# EAGLE board Joy2PS2_rev2_3 (EAGLE 7.6.0)
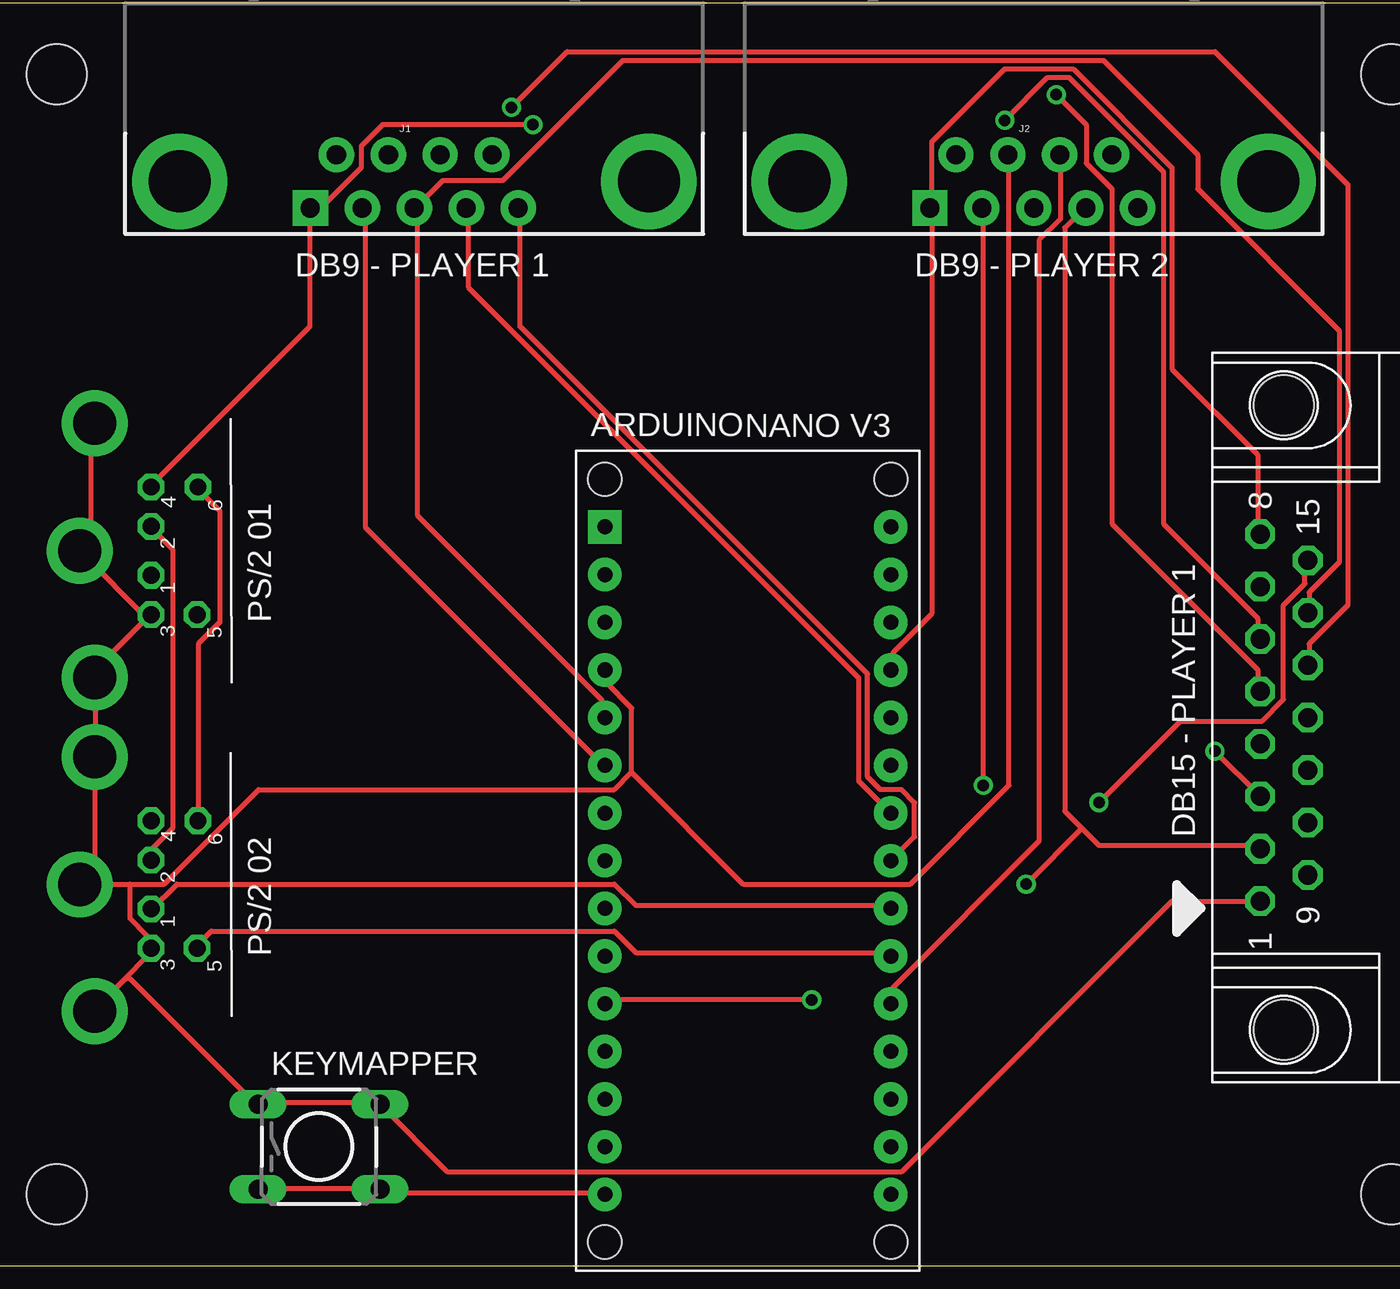
[diagram p0: board, top side]
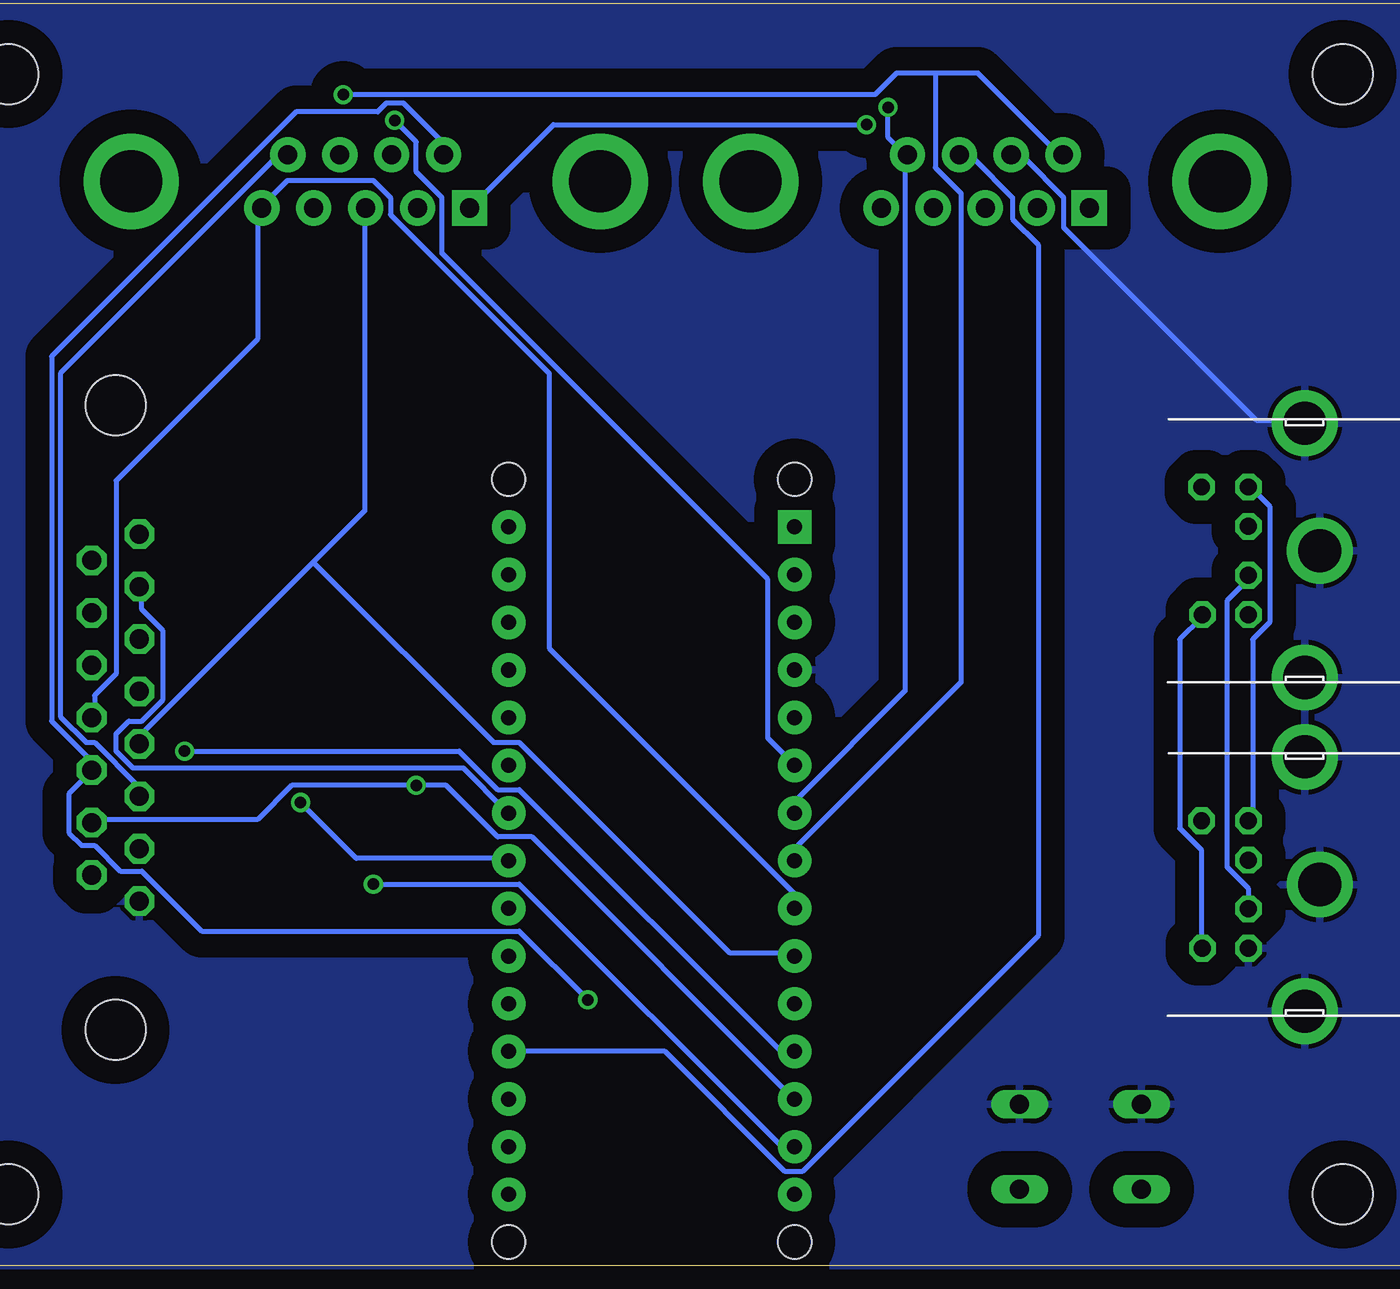
[diagram p1: board, bottom side, seen from below]

No outline drawn. Coordinates in mm, seen from the top.
Copper layers (1*16): Top 0.035mm / dielectric 1.5mm / Bottom 0.035mm
Design rules "default": minimum track width 10mil, minimum drill 24mil, track to track 8mil, track to pad 8mil, pad to pad 8mil, via to via 8mil, smd to smd 8mil, copper to edge 40mil, drill to drill 8mil, minimum pad ring 10mil, minimum via ring 8mil, stop-mask expansion 4mil, vias tented up to drill 0mil, thermal gap 10mil
Holes 3.2 mm at 59.69,63.5 59.69,3.81 -11.43,63.5 -11.43,3.81
Milling: 4 lines

## Footprints (pad centres in the part's own frame; a part is rotated, then mirrored left to right if it is on the bottom)
PDIP-32 = drill 0.8 pad 1.778: 3V3 15.24,-35.56; +5V 15.24,-10.16; A0 15.24,-30.48; A1 15.24,-27.94; A2 15.24,-25.4; A3 15.24,-22.86; A4 15.24,-20.32; A5 15.24,-17.78; A6 15.24,-15.24; A7 15.24,-12.7; AREF 15.24,-33.02; D0/RX 0,-5.08; D2 0,-12.7; D3 0,-15.24; D4 0,-17.78; D5 0,-20.32; D6 0,-22.86; D7 0,-25.4; D8 0,-27.94; D9 0,-30.48; D10 0,-33.02; D11 0,-35.56; D12 0,-38.1; D13 15.24,-38.1; GND 0,-10.16; GND1 15.24,-5.08; RESET 0,-7.62; RESET1 15.24,-7.62; VIN 15.24,-2.54 | drill 0.8 pad 1.778 square: D1/TX 0,-2.54 | hole 1.778: 0,0; 0,-40.64; 15.24,-40.64; 15.24,0
D-15M/90 = drill 1.016 pad 1.575 octagon: 1 9.779,-1.27; 2 6.985,-1.27; 3 4.191,-1.27; 4 1.397,-1.27; 5 -1.397,-1.27; 6 -4.191,-1.27; 7 -6.985,-1.27; 8 -9.779,-1.27; 9 8.382,1.27; 10 5.588,1.27; 11 2.794,1.27; 12 0,1.27; 13 -2.794,1.27; 14 -5.588,1.27; 15 -8.382,1.27 | hole 3.2: 16.637,0; -16.637,0
DB9_MALE = drill 1.016 pad 1.88: 1 5.54,-1.42; 2 2.77,-1.42; 3 0,-1.42; 4 -2.77,-1.42; 6 4.15,1.42; 7 1.38,1.42; 8 -1.38,1.42; 9 -4.15,1.42 | drill 1.016 pad 1.88 square: 5 -5.54,-1.42 | drill 3.302 pad 5.08: G1 -12.5,0; G2 12.5,0
TAC-SWITCH-PTH = drill 1.016 pad 1.524 long: 1 -3.251,2.261; 2 3.251,2.261; 3 -3.251,-2.261; 4 3.251,-2.261
M_DIN6 = drill 0.9 pad 1.422 octagon: 1 -1.3,-3.75; 2 1.3,-3.75; 3 -3.4,-3.75; 4 3.4,-3.75; 5 -3.4,-6.2; 6 3.4,-6.25 | drill 2.3 pad 3.5: SH1 6.8,-0.75; SH2 0,0.05; SH3 -6.75,-0.75

## Placement (x,y rotation side)
ARDUINONANO  ARDUINONANO  [PDIP-32]  17.78,41.91 0 top
CON3  [D-15M/90]  53.98,29.21 270 top
J1  [DB9_MALE]  7.62,57.78 0 top
J2  [DB9_MALE]  40.64,57.78 0 top
KEYMAPPER  TACTILE-SWITCH-PTH  [TAC-SWITCH-PTH]  2.54,6.35 0 top
PS/2_01  [M_DIN6]  -10.16,38.1 90 top
PS/2_02  [M_DIN6]  -10.16,20.32 90 top

## Library data of the parts
ARDUINONANO = jet-lib2
CON3 = connect
J1 J2 = SparkFun-Connectors; PROD_ID: CONN-09904
KEYMAPPER = GeekAmmo
PS/2_01 PS/2_02 = mini_din

## Nets
GND: ARDUINONANO.GND CON3.1 J1.8 J2.8 KEYMAPPER.1 KEYMAPPER.2 PS/2_01.3 PS/2_01.SH1 PS/2_01.SH2 PS/2_01.SH3 PS/2_02.3 PS/2_02.SH1 PS/2_02.SH2 PS/2_02.SH3
N$1: ARDUINONANO.A3 PS/2_01.1 PS/2_02.1
N$2: PS/2_01.2 PS/2_02.2
N$3: ARDUINONANO.+5V CON3.8 J1.5 J2.5 PS/2_01.4 PS/2_02.4
N$4: ARDUINONANO.A0 J1.7
N$5: ARDUINONANO.A2 PS/2_01.5 PS/2_02.5
N$6: ARDUINONANO.D10 CON3.10 J2.4
N$7: ARDUINONANO.D8 CON3.11 J2.9
N$8: ARDUINONANO.A1 J2.7
N$9: ARDUINONANO.A5 CON3.7 J1.2
N$10: ARDUINONANO.D2 CON3.14 J1.3
N$11: ARDUINONANO.D3 CON3.6 J1.4
N$12: ARDUINONANO.D4 CON3.13 J1.6
N$13: ARDUINONANO.D5 CON3.5 J1.9
N$14: ARDUINONANO.D6 CON3.12 J2.1
N$15: ARDUINONANO.D7 CON3.4 J2.3
N$16: ARDUINONANO.D9 CON3.3 J2.6
N$17: ARDUINONANO.D11 CON3.2 J2.2
N$18: ARDUINONANO.A4 CON3.15 J1.1
N$19: ARDUINONANO.D12 KEYMAPPER.3 KEYMAPPER.4
N$20: PS/2_01.6 PS/2_02.6

## Tracks (layer width: path | path; a pad name or v marks a point on that pad's centre or on a via)
GND
  Top 0.254: CON3.1 48.01,19.43 33.6,5.03 9.37,5.03 KEYMAPPER.2 5.71,8.69 -0.69,8.69 KEYMAPPER.1 -0.91,8.69 -7.54,15.32 -7.77,15.32 | -6.63,34.52 -9.6,31.55 PS/2_01.SH3 -9.37,31.32 -9.37,27.2 PS/2_02.SH1 -9.37,26.98 -9.37,20.34 | -6.63,34.52 -10.06,37.95 PS/2_01.SH2 -10.06,38.18 -9.6,38.63 -9.6,44.81 PS/2_01.SH1 | -6.63,34.52 PS/2_01.3 | -7.77,15.32 -9.37,13.72 PS/2_02.SH3 | -7.77,15.32 -6.63,16.46 -6.63,16.92 PS/2_02.3 -6.63,17.14 -6.63,17.6 -7.54,18.52 -7.54,20.34 | 19.2,26.29 19.2,29.72 17.83,31.09 17.83,31.55 ARDUINONANO.GND | 19.2,26.29 18.29,25.38 -0.69,25.38 -5.71,20.34 -7.54,20.34 | -9.37,20.34 -10.06,20.34 PS/2_02.SH2 -9.37,20.34 | -9.37,20.34 -7.54,20.34 | 19.2,26.29 25.15,20.34 34.06,20.34 39.32,25.6 39.32,58.98 J2.8
  Bottom 0.254: J1.8 6.17,58.98 5.49,58.98 3.43,56.92 3.43,55.32 -6.86,45.03 -9.37,45.03 PS/2_01.SH1
  pour Bottom (isolate 1.27): -15.24,67.31 63.5,67.31 63.5,0 -15.24,0
N$1
  Top 0.254: ARDUINONANO.A3 32.92,19.2 19.43,19.2 18.29,20.34 -5.03,20.34 -6.4,18.97 PS/2_02.1
  Bottom 0.254: PS/2_02.1 -6.4,19.2 -6.4,20.12 -5.26,21.26 -5.26,35.43 -6.4,36.58 PS/2_01.1
N$2
  Top 0.254: PS/2_02.2 -6.4,21.72 -6.4,22.17 -5.26,23.32 -5.26,38.18 -6.4,39.32 PS/2_01.2
N$3  (via drill 0.61)
  Top 0.254: PS/2_01.4 -6.4,41.6 2.06,50.06 2.06,56.24 J1.5 2.29,56.46 2.74,56.46 4.8,58.52 4.8,59.66 5.94,60.81 v13.95,60.81 | CON3.8 52.58,39.09 52.58,43.2 48.01,47.78 48.01,58.52 42.75,63.78 39.09,63.78 35.2,59.89 35.2,56.46 J2.5 35.2,56.24 35.2,34.75 33.15,32.69 33.15,31.77 ARDUINONANO.+5V
  Bottom 0.254: PS/2_02.4 -6.63,23.77 -6.63,33.38 -7.54,34.29 -7.54,40.46 -6.63,41.38 PS/2_01.4 | v13.95,60.81 30.63,60.81 34.98,56.46 J2.5
N$4
  Bottom 0.254: ARDUINONANO.A0 24.69,11.43 18.29,5.03 17.37,5.03 4.8,17.6 4.8,54.41 6.17,55.78 6.17,56.92 8.23,58.98 8.91,58.98 J1.7
N$5
  Top 0.254: ARDUINONANO.A2 32.92,16.69 19.43,16.69 18.29,17.83 -3.2,17.83 -3.89,17.14 PS/2_02.5
  Bottom 0.254: PS/2_02.5 -3.89,17.14 -3.89,22.17 -2.74,23.32 -2.74,33.38 -3.89,34.52 PS/2_01.5
N$6  (via drill 0.61)
  Top 0.254: v37.95,25.6 37.95,56.24 J2.4
  Bottom 0.254: CON3.10 55.09,23.77 46.41,23.77 44.58,25.6 v37.95,25.6 36.35,25.6 33.6,22.86 31.77,22.86 17.83,8.91 ARDUINONANO.D10
N$7  (via drill 0.61)
  Top 0.254: v28.8,14.17 17.83,14.17 ARDUINONANO.D8
  Bottom 0.254: J2.9 36.58,59.21 36.58,59.89 38.63,61.95 39.55,61.95 40.01,61.49 44.35,61.49 57.38,48.46 57.38,29.03 55.32,26.98 55.32,26.52 CON3.11 55.32,26.29 56.46,25.15 56.46,23.09 55.78,22.4 55.09,22.4 53.72,21.03 52.58,21.03 49.38,17.83 32.46,17.83 v28.8,14.17
N$8
  Top 0.254: ARDUINONANO.A1 33.15,14.17 33.15,14.86 40.92,22.63 40.92,54.63 42.06,55.78 42.06,58.98 J2.7
N$9
  Top 0.254: ARDUINONANO.A5 31.32,25.83 31.32,31.32 10.52,52.12 10.52,56.24 J1.2
  Bottom 0.254: CON3.7 52.58,36.12 52.58,34.98 51.44,33.83 51.44,30.18 52.58,29.03 53.26,29.03 53.95,28.35 53.95,27.43 53.03,26.52 35.43,26.52 33.15,24.23 ARDUINONANO.A5
N$10
  Top 0.254: CON3.14 55.32,34.98 55.32,35.89 56.92,37.49 56.92,49.84 49.38,57.38 49.38,59.21 44.35,64.24 18.75,64.24 12.34,57.84 9.14,57.84 7.77,56.46 J1.3 7.77,56.24 7.77,40.01 17.6,30.18 17.6,29.26 ARDUINONANO.D2
N$11  (via drill 0.61)
  Top 0.254: v39.09,61.04 41.38,63.32 42.52,63.32 47.55,58.29 47.55,39.55 52.58,34.52 52.58,33.6 CON3.6 | J1.4 5.03,56.24 5.03,39.32 17.6,26.75 ARDUINONANO.D3
  Bottom 0.254: v39.09,61.04 37.95,59.89 37.95,58.29 36.58,56.92 36.58,53.95 19.2,36.58 19.2,28.12 17.83,26.75 ARDUINONANO.D3
N$12  (via drill 0.61)
  Top 0.254: v12.8,61.72 15.77,64.69 50.29,64.69 57.38,57.61 57.38,35.2 55.32,33.15 55.32,32 CON3.13
  Bottom 0.254: v12.8,61.72 12.8,60.12 11.89,59.21 J1.6 11.89,58.98 11.89,30.63 17.6,24.92 17.6,24.23 ARDUINONANO.D4
N$13  (via drill 0.61)
  Top 0.254: v41.83,62.41 43.43,60.81 43.43,58.75 44.81,57.38 44.81,39.55 52.58,31.77 52.58,30.63 CON3.5
  Bottom 0.254: v41.83,62.41 13.49,62.41 12.34,63.55 10.29,63.55 | 10.29,63.55 8,63.55 3.66,59.21 J1.9 | 10.29,63.55 10.29,58.52 8.91,57.15 8.91,31.09 17.6,22.4 17.6,21.72 ARDUINONANO.D5
N$14
  Bottom 0.254: CON3.12 55.09,29.26 55.09,30.4 53.95,31.55 53.95,41.83 46.41,49.38 46.41,56.24 J2.1 46.18,56.46 44.81,57.84 40.23,57.84 39.32,56.92 39.32,56.01 30.86,47.55 30.86,32.92 17.83,19.89 17.83,19.2 ARDUINONANO.D6
N$15
  Bottom 0.254: 43.43,37.49 40.69,40.23 40.69,56.24 J2.3 | 43.43,37.49 52.58,28.35 52.58,27.89 CON3.4 | 43.43,37.49 33.83,27.89 32.46,27.89 21.26,16.69 17.83,16.69 ARDUINONANO.D7
N$16  (via drill 0.61)
  Top 0.254: CON3.3 v50.29,27.43
  Bottom 0.254: CON3.3 52.81,25.15 52.81,25.6 55.09,27.89 55.55,27.89 56.92,29.26 56.92,47.55 45.49,58.98 44.81,58.98 J2.6 | ARDUINONANO.D9 18.52,11.43 32.46,25.38 33.6,25.38 35.66,27.43 v50.29,27.43
N$17  (via drill 0.61)
  Top 0.254: 43.2,23.32 42.29,24.23 42.29,55.32 43.2,56.24 J2.2 | 43.2,23.32 44.12,22.4 52.58,22.4 CON3.2 | 43.2,23.32 v40.23,20.34
  Bottom 0.254: v40.23,20.34 32.46,20.34 18.52,6.4 17.83,6.4 ARDUINONANO.D11
N$18  (via drill 0.61)
  Top 0.254: v44.12,24.69 48.46,29.03 52.81,29.03 53.95,30.18 53.95,35.2 55.09,36.35 55.09,37.49 CON3.15 | ARDUINONANO.A4 34.29,22.86 34.29,24.69 33.6,25.38 32.46,25.38 31.77,26.06 31.77,31.55 13.26,50.06 13.26,56.24 J1.1
  Bottom 0.254: v44.12,24.69 41.15,21.72 33.15,21.72 ARDUINONANO.A4
N$19
  Top 0.254: KEYMAPPER.3 -0.69,4.12 5.71,4.12 KEYMAPPER.4 5.94,3.89 17.6,3.89 ARDUINONANO.D12
N$20
  Top 0.254: PS/2_02.6 -3.89,23.77 -3.89,33.15 -2.74,34.29 -2.74,40.23 -3.89,41.38 PS/2_01.6

## Text on the board
tNames: DB9 - PLAYER 1 | DB9 - PLAYER 2 | NANO V3 | PS/2 01 | PS/2 02 | DB15 - PLAYER 1